# Altium PCB warship_demo_PCB.PcbDoc (part 3 of 3)
Units mm, origin at the board's own origin, x right, y up, seen from the top; angles counter-clockwise.
Board outline 160.38 x 121.38 mm, 2 copper layers (Top Layer, Bottom Layer); 272 components, 249 nets, 1200 pads, 295 vias.
Unrouted connection lines stored in the file: 2.
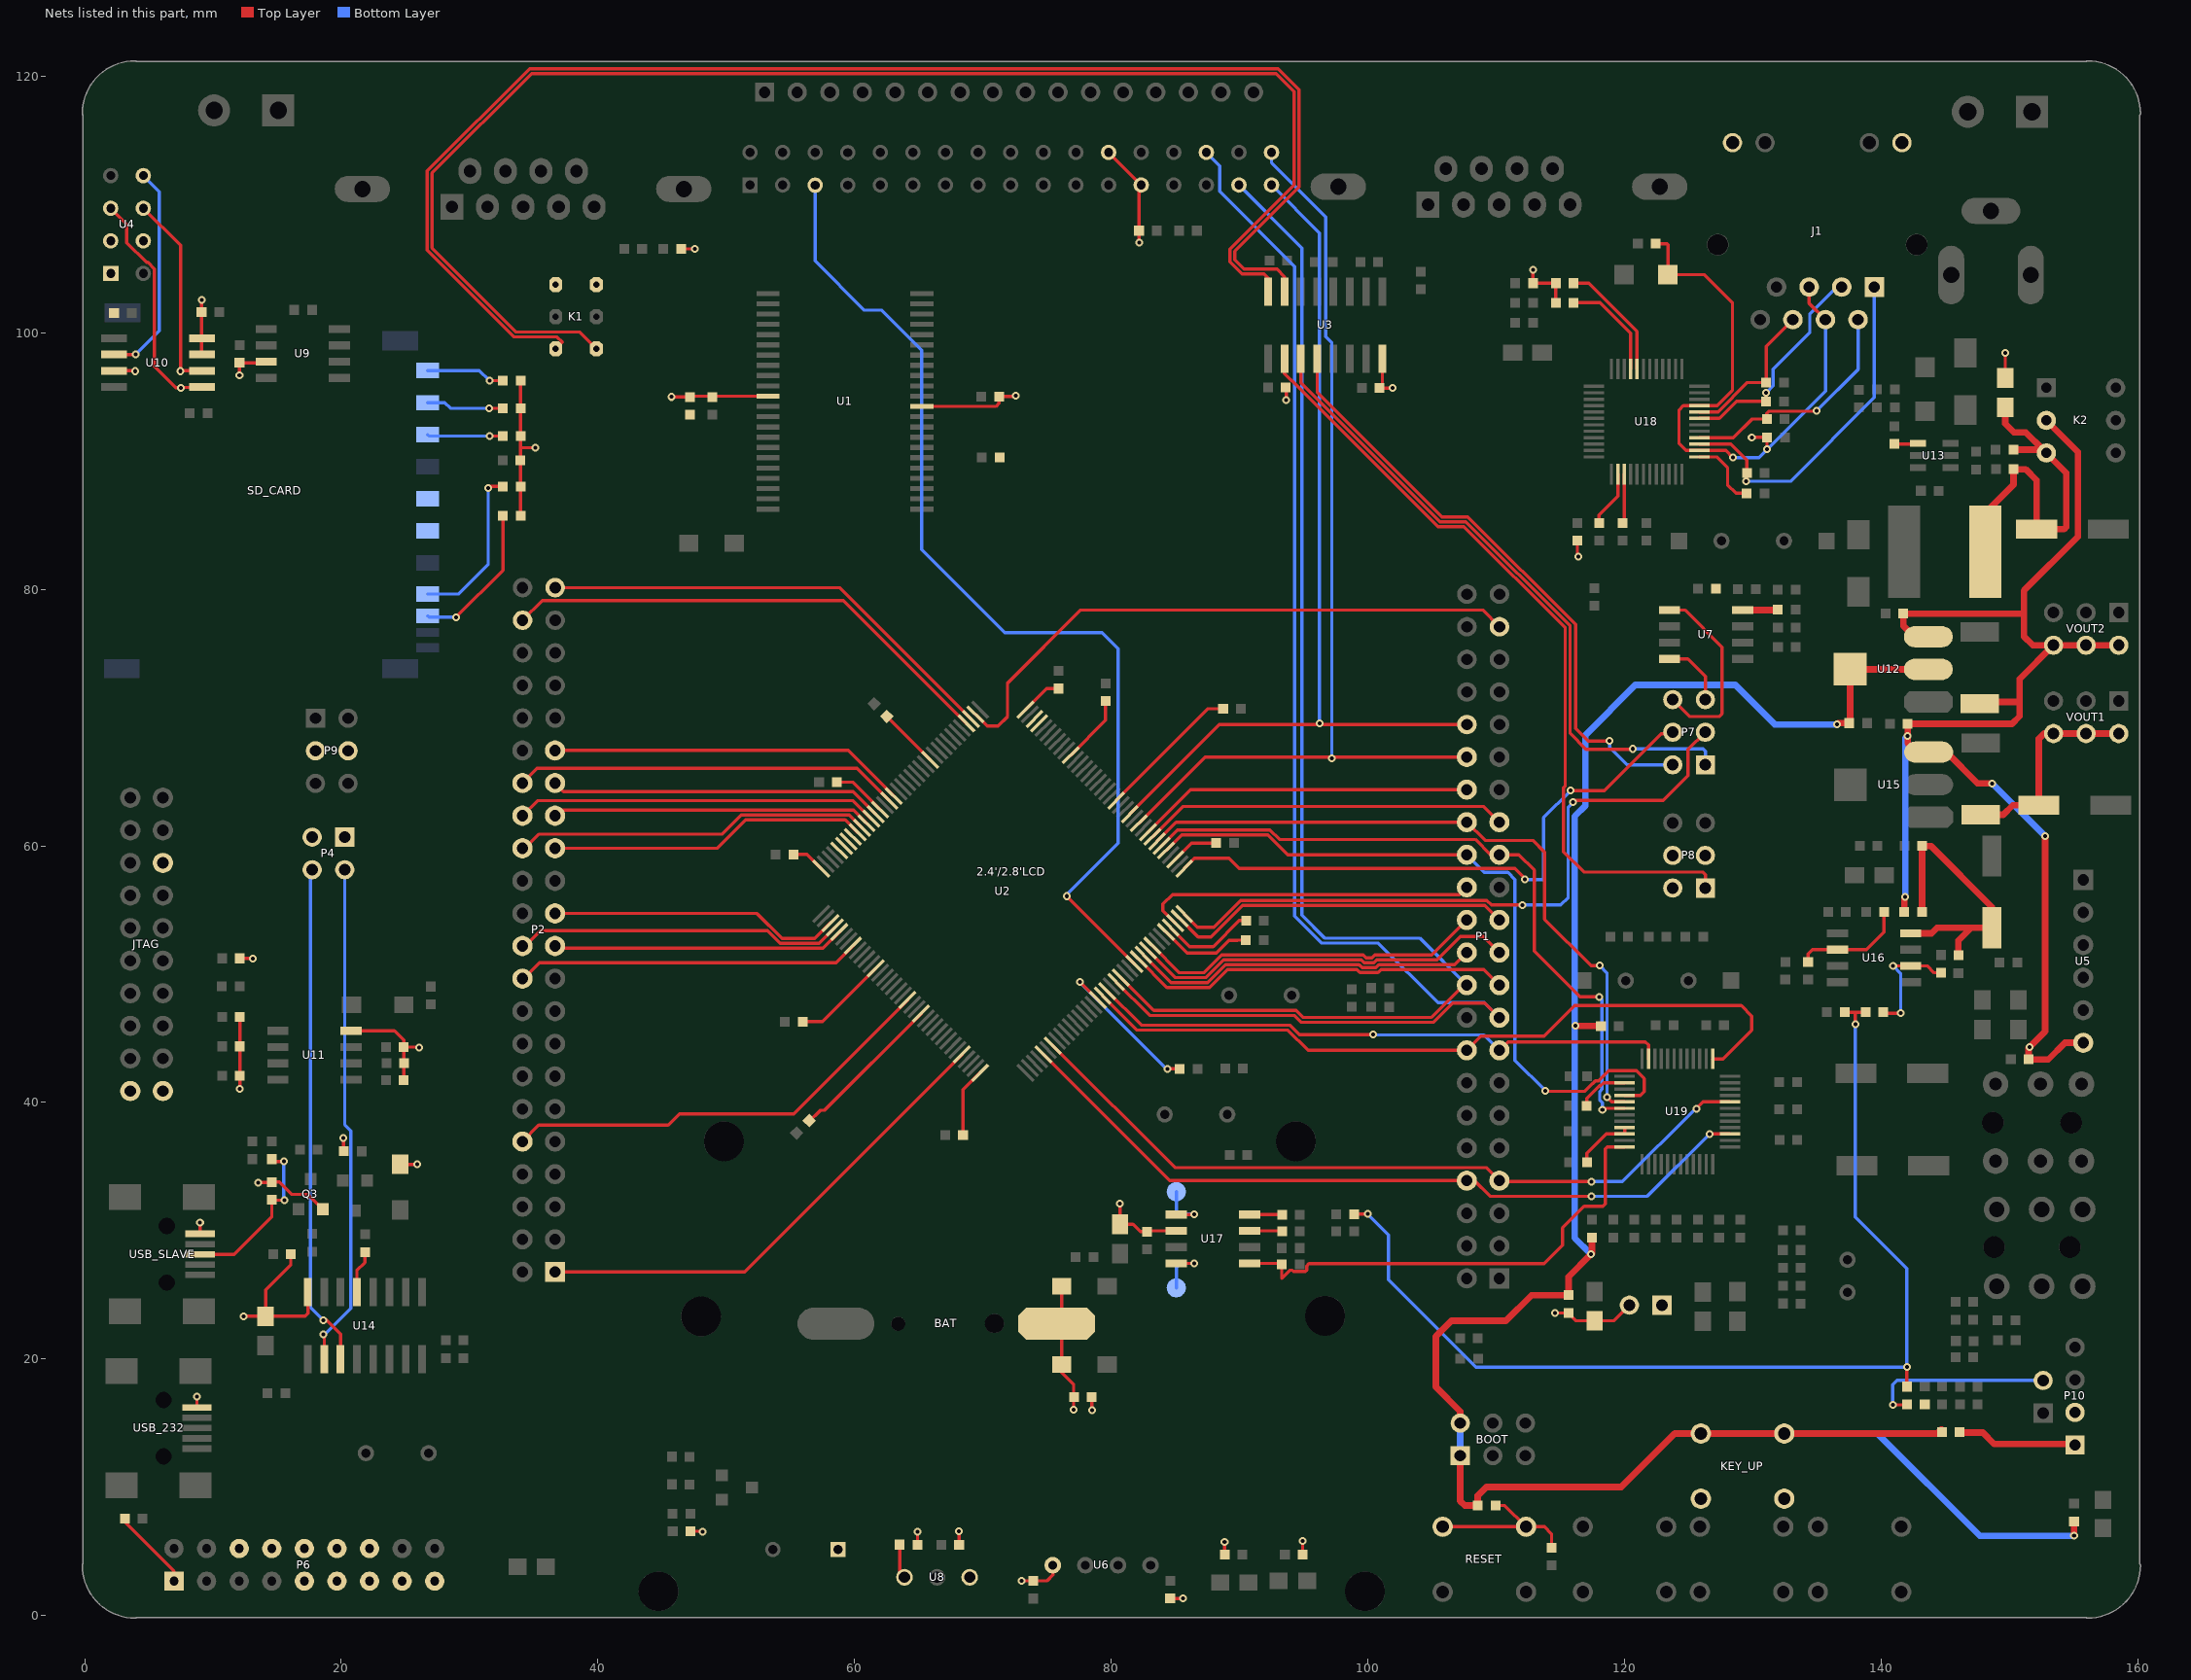
[diagram p3: the nets of this part, all layers, seen from the top]

## Via types
v1: diameter 0.61, hole 0.305, Top Layer to Bottom Layer, 291 vias
v2: diameter 3.58, hole 2.5, Top Layer to Bottom Layer, tented both sides, 4 vias

## Nets (pads, with @x,y where several pads share a name; then routed paths per layer and width w, separated by ;. In a path a pad name is that pad's centre, name@x,y a point inside that pad or via, vN(x,y) a via of type N, cw(c..) or ccw(c..) an arc to the next point about the centre after c; other vN are vias at no path point) (continued)
NetR33_1: R33.1 R35.1 USB_SLAVE.3 | length 13.5
  Top Layer w0.254: USB_SLAVE.3@8.993,28.169 11.659,28.169 14.58,31.09 R35.1@14.58,32.41 14.757,32.233 14.91,32.385 v1(15.57,32.385) ; R33.1@14.58,35.585 14.757,35.408 v1(15.519,35.408)
  Bottom Layer w0.254: v1(15.519,35.408) 15.519,32.309 15.57,32.36 v1(15.57,32.385)
NetR44_2: R44.2 U13.4 | length 1.9
  Top Layer w0.254: R44.2@141.019,91.326 142.801,91.326 U13.4@142.85,91.374
NetR47_2: R47.2 U14.13 | length 3.4
  Top Layer w0.254: U14.13@21.209,25.206 21.209,26.899 21.844,27.534 R47.2@21.844,28.346
NetR50_2: R50.2 R51.2 U16.2 | length 8.8
  Top Layer w0.254: R51.2@134.291,50.965 134.291,51.589 134.62,51.918 U16.2@136.591,51.918 138.836,51.918 140.208,53.289 R50.2@140.208,54.862
NetR53_2: R53.2 R56.1 U16.6 | length 9.3
  Top Layer w0.254: R56.1@140.157,47.039 140.159,47.041 140.235,46.965 v1(141.503,46.965) ; v1(140.919,50.648) U16.6@142.291,50.648 143.586,50.648 144.12,50.114 R53.2@144.653,50.114
  Bottom Layer w0.254: v1(140.919,50.648) 141.503,50.063 v1(141.503,46.965)
NetR58_1: R58.1 U17.3 | length 2.6
  Top Layer w0.254: U17.3@90.765,29.997 93.283,29.997 R58.1@93.307,29.974
NetR61_1: R61.1 U17.4 | length 2.6
  Top Layer w0.254: U17.4@90.765,31.267 93.283,31.267 R61.1@93.307,31.244
NetR63_2: R63.2 U18.1 | length 5.7
  Top Layer w0.254: U18.1@125.813,90.318 127.182,90.318 128.016,89.484 128.016,88.138 128.675,87.479 R63.2@129.502,87.479
NetR65_2: R65.2 U18.21 | length 8.2
  Top Layer w0.254: R65.2@116.014,102.335 118.086,102.335 120.463,99.958 U18.21@120.463,97.168
NetR66_2: R66.2 U18.20 | length 9.4
  Top Layer w0.254: R66.2@116.014,103.859 117.197,103.859 120.963,100.093 U18.20@120.963,97.168
NetR68_1: R68.1 U19.26 | length 4
  Top Layer w0.254: R68.1@117.043,39.751 117.043,40.31 118.032,41.299 118.119,41.299 118.366,41.546 U19.26@120,41.546
NetR70_2: R70.2 U19.33 U19.34 | length 4.8
  Top Layer w0.254: R70.2@117.056,35.328 117.056,36.03 118.572,37.546 U19.34@120,37.546 U19.33@120,38.046
NetR72_2: R72.2 U18.38 | length 4.4
  Top Layer w0.254: R72.2@118.01,85.179 118.01,85.803 119.463,87.256 U18.38@119.463,88.968
NetR74_2: R74.2 U18.39 | length 3.8
  Top Layer w0.254: R74.2@119.839,85.179 119.963,85.303 U18.39@119.963,88.968
NetSP+_1: SP+.1 U17.5 | length 4.5
  Top Layer w0.254: U17.5@85.065,31.267 86.436,31.267 v1(86.462,31.293)
  Bottom Layer w0.254: SP+.1@85.065,33.045 85.065,31.471 85.242,31.293 v1(86.462,31.293)
NetSP-_1: SP-.1 U17.8 | length 4.5
  Top Layer w0.254: U17.8@85.065,27.457 v1(86.462,27.457)
  Bottom Layer w0.254: SP-.1@85.065,25.552 85.065,27.127 85.395,27.457 v1(86.462,27.457)
NRF_CE: P2.32 U2.93 U4.3 | length 30.1
  Top Layer w0.254: P2.32@34.112,64.897 35.255,66.04 60.192,66.04 U2.93@62.697,63.535
NRF_CS: P2.33 U2.92 U4.4 | length 27.9
  Top Layer w0.254: P2.33@36.652,67.437 59.502,67.437 U2.92@63.051,63.888
OV_D0: P1.19 P6.8 U2.26 | length 30.3
  Top Layer w0.254: U2.26@82.143,51.161 84.332,48.971 87.655,48.971 89.052,50.368 99.142,50.368 99.371,50.14 100.781,50.14 101.01,50.368 109.017,50.368 P1.19@110.236,49.149
OV_D1: P1.22 P6.9 U2.27 | length 27.3
  Top Layer w0.254: U2.27@82.496,51.514 84.658,49.352 87.498,49.352 88.895,50.749 99.3,50.749 99.529,50.521 100.623,50.521 100.852,50.749 106.756,50.749 P1.22@107.696,51.689
OV_D2: P1.21 P6.10 U2.28 | length 30.3
  Top Layer w0.254: U2.28@82.85,51.868 84.984,49.733 87.34,49.733 88.737,51.13 99.458,51.13 99.687,50.902 100.465,50.902 100.694,51.13 105.385,51.13 107.188,52.934 108.991,52.934 P1.21@110.236,51.689
OV_D3: P1.24 P6.11 U2.29 | length 27.3
  Top Layer w0.254: U2.29@83.204,52.221 85.31,50.114 87.182,50.114 88.579,51.511 99.616,51.511 99.845,51.283 100.307,51.283 100.536,51.511 104.978,51.511 P1.24@107.696,54.229
OV_D4: P1.29 P6.12 U2.44 | length 28.5
  Top Layer w0.254: U2.44@83.204,60.706 85.565,63.068 109.017,63.068 P1.29@110.236,61.849
OV_D5: P1.32 P6.13 U2.45 | length 26.2
  Top Layer w0.254: U2.45@82.85,61.06 86.179,64.389 P1.32@107.696,64.389
OV_D6: P2.31 P6.14 U2.96 | length 26
  Top Layer w0.254: P2.31@36.652,64.897 37.313,64.237 59.874,64.237 U2.96@61.637,62.474
OV_D7: P2.30 P6.15 U2.97 | length 28.2
  Top Layer w0.254: P2.30@34.112,62.357 35.281,63.525 59.878,63.525 U2.97@61.283,62.121
OV_SDA: P2.10 P6.6 U2.128 | length 34.6
  Top Layer w0.254: P2.10@34.112,36.957 35.382,38.227 45.466,38.227 46.355,39.116 55.249,39.116 U2.128@64.112,47.979
OV_VSYNC: P2.27 P6.17 R54.1 U2.100 | length 24.9
  Top Layer w0.254: P2.27@36.652,59.817 49.301,59.817 51.511,62.027 59.256,62.027 U2.100@60.223,61.06
PA0: KEY_UP.2 P1.26 U2.34 | length 26.1
  Top Layer w0.254: U2.34@84.971,53.989 84.023,54.937 84.023,55.474 84.76,56.21 107.137,56.21 P1.26@107.696,56.769
PA1: P1.23 P10.2 U2.35 | length 27
  Top Layer w0.254: U2.35@85.325,54.343 86.759,52.908 87.757,52.908 90.221,55.372 109.093,55.372 P1.23@110.236,54.229
PA2: P7.3 U2.36 | length 52.9
  Top Layer w0.254: U2.36@85.678,54.696 86.704,53.67 87.98,53.67 90.063,55.753 109.251,55.753 109.606,55.397 v1(112.039,55.397) ; v1(115.976,63.398) 116.129,63.551 123.012,63.551 124.943,65.481 124.943,67.513 P7.3@126.289,68.859
  Bottom Layer w0.254: v1(112.039,55.397) 115.011,55.397 115.595,55.982 115.595,63.017 v1(115.976,63.398)
PA3: P7.4 U2.37 | length 46.9
  Top Layer w0.254: U2.37@85.678,58.232 86.476,59.03 89.179,59.03 89.967,58.242 111.455,58.242 112.217,57.48 v1(112.217,57.379) ; v1(115.799,64.313) 118.415,64.313 122.834,68.732 P7.4@124.003,68.732
  Bottom Layer w0.254: v1(112.217,57.379) 113.69,57.379 113.69,62.205 v1(115.799,64.313)
PA5: P1.28 U2.41 U19.28 | length 57.9
  Top Layer w0.254: U2.41@84.264,59.646 85.477,60.858 92.202,60.858 93.751,59.309 P1.28@107.696,59.309 ; v1(113.817,40.919) 113.868,40.869 116.865,40.869 117.499,41.502 117.536,41.502 117.714,41.68 117.961,41.68 118.75,42.469 120.904,42.469 121.514,41.859 121.514,40.843 121.216,40.546 U19.28@120,40.546
  Bottom Layer w0.254: P1.28@107.696,59.309 109.068,57.937 110.896,57.937 111.455,57.379 111.455,43.282 v1(113.817,40.919)
PA6: P1.27 U2.42 U19.30 | length 54.5
  Top Layer w0.254: U2.42@83.911,59.999 85.151,61.239 92.36,61.239 93.096,60.503 108.356,60.503 109.55,59.309 P1.27@110.236,59.309 111.76,59.309 112.954,58.115 112.954,51.807 116.527,48.235 v1(118.034,48.235) ; v1(118.262,39.446) 118.362,39.546 U19.30@120,39.546
  Bottom Layer w0.254: v1(118.034,48.235) 118.237,48.031 118.237,41.024 118.059,40.846 118.059,40.18 118.262,39.977 v1(118.262,39.446)
PA7: P1.30 U2.43 U19.29 | length 54.8
  Top Layer w0.254: U2.43@83.557,60.353 85.053,61.849 P1.30@107.696,61.849 109.118,60.427 112.852,60.427 113.767,59.512 113.767,54.28 117.373,50.673 v1(118.059,50.673) ; v1(118.618,40.411) 118.983,40.046 U19.29@120,40.046
  Bottom Layer w0.254: v1(118.059,50.673) 118.618,50.114 v1(118.618,40.411)
PA9: P4.3 U2.101
PA10: P4.1 U2.102
PA11: P9.3 U2.103
PA12: P9.4 U2.104
PB1: 2.4'/2.8'LCD.34 P1.34 U2.47 | length 76.9
  Top Layer w0.254: U2.47@82.143,61.767 87.305,66.929 P1.34@107.696,66.929
  Bottom Layer w0.254: 2.4'/2.8'LCD.34@92.481,114.046 92.481,113.233 96.698,109.017 96.698,99.692 97.18,99.21 v1(97.18,66.827)
PB9: P2.1 R31.2 U2.140 U8.1 | length 41.4
  Top Layer w0.254: P2.1@36.652,26.797 51.415,26.797 U2.140@68.354,43.736 ; R31.2@63.513,5.539 63.513,3.365 U8.1@63.881,2.997
PB10: P8.3 U2.69
PB11: P8.4 U2.70
PB13: P1.41 U2.74 U4.5 U10.6 | length 62.6
  Top Layer w0.254: U4.5@4.572,109.703 7.468,106.807 v1(7.468,97.003) 7.495,97.03 U10.6@9.144,97.03 ; U2.74@69.415,70.252 70.325,69.342 71.171,69.342 71.907,70.079 71.907,72.695 77.597,78.384 108.941,78.384 P1.41@110.247,77.078
PB14: P2.43 U2.75 U4.7 U10.2 | length 53.5
  Top Layer w0.254: U10.2@2.286,98.298 v1@3.912,98.298 ; P2.43@36.663,80.126 58.834,80.126 U2.75@69.061,69.899
  Bottom Layer w0.254: v1(3.962,98.298) 5.817,100.152 5.817,110.998 U4.7@4.572,112.243
PB15: P2.42 U2.76 U4.6 U10.5 | length 57.4
  Top Layer w0.254: U4.6@2.032,109.703 3.277,108.458 3.277,107.01 4.81,105.477 4.926,105.477 5.426,104.976 5.426,97.368 7.087,95.707 v1(7.493,95.707) ; v1@7.52,95.734 U10.5@9.169,95.734 ; P2.42@34.123,77.586 35.658,79.121 59.132,79.121 U2.76@68.708,69.545
PC8: P2.29 R28.1 SD_CARD.7 U2.98 | length 37.7
  Top Layer w0.254: v1(31.445,87.884) 31.572,88.011 R28.1@32.588,88.011 ; P2.29@36.652,62.357 37.084,62.789 59.908,62.789 U2.98@60.93,61.767
  Bottom Layer w0.254: SD_CARD.7@26.721,79.629 29.108,79.629 31.445,81.966 v1(31.445,87.884)
PC9: P2.28 R29.1 SD_CARD.8 U2.99 | length 39.6
  Top Layer w0.254: v1(28.931,77.826) 32.588,81.483 R29.1@32.588,85.725 ; P2.28@34.112,59.817 34.29,59.817 35.382,60.909 49.657,60.909 51.156,62.408 59.582,62.408 U2.99@60.576,61.414
  Bottom Layer w0.254: SD_CARD.8@26.73,77.925 26.83,77.826 v1(28.931,77.826)
PC10: P2.23 R18.1 SD_CARD.9 U2.111 | length 29
  Top Layer w0.254: v1(31.547,96.266) R18.1@32.588,96.266 ; P2.23@36.652,54.737 52.395,54.737 54.351,52.781 56.894,52.781 U2.111@58.101,53.989
  Bottom Layer w0.254: SD_CARD.9@26.721,97.054 30.759,97.053 v1(31.547,96.266)
PC11: P2.22 R21.1 SD_CARD.1 U2.112 | length 31.8
  Top Layer w0.254: v1(31.521,94.107) R21.1@32.588,94.107 ; P2.22@34.112,52.197 34.315,52.197 35.509,53.391 53.202,53.391 54.193,52.4 57.22,52.4 U2.112@58.455,53.635
  Bottom Layer w0.254: SD_CARD.1@26.73,94.537 28.069,94.537 28.499,94.107 v1(31.521,94.107)
PC12: P2.21 SD_CARD.5 U2.113 | length 22.8
  Top Layer w0.254: P2.21@36.652,52.197 36.83,52.019 57.546,52.019 U2.113@58.808,53.282
PC13: P1.7 U2.7 U19.8 | length 59.7
  Top Layer w0.254: U2.7@75.425,44.443 84.943,34.925 109.22,34.925 P1.7@110.236,33.909 110.312,33.833 v1(117.424,33.833) ; v1(125.578,39.522) 126.101,40.046 U19.8@128.2,40.046
  Bottom Layer w0.254: v1(117.424,33.833) 119.834,33.833 125.524,39.522 v1(125.578,39.522)
PD2: P2.20 R23.1 SD_CARD.2 U2.116 | length 32.7
  Top Layer w0.254: v1(31.547,91.948) R23.1@32.588,91.948 ; P2.20@34.112,49.657 34.188,49.657 35.433,50.902 58.549,50.902 U2.116@59.869,52.221
  Bottom Layer w0.254: SD_CARD.2@26.73,92.048 26.83,91.948 v1(31.547,91.948)
PE6: P1.8 U2.5 U19.3 | length 60.1
  Top Layer w0.254: U2.5@74.718,43.736 84.545,33.909 P1.8@107.696,33.909 108.28,33.909 109.499,32.69 v1(117.424,32.69) ; v1(126.619,37.541) 126.624,37.546 U19.3@128.2,37.546
  Bottom Layer w0.254: v1(117.424,32.69) 121.768,32.69 v1(126.619,37.541)
PF6: P1.16 U2.18 U19.13 | length 59.2
  Top Layer w0.254: U2.18@79.314,48.332 82.003,45.644 93.758,45.644 95.333,44.069 P1.16@107.696,44.069 108.788,45.161 113.716,45.161 116.103,47.549 129.083,47.549 129.896,46.736 129.896,45.644 127.648,43.396 U19.13@126.85,43.396
PF7: P1.15 U2.19 U19.23 | length 45.6
  Top Layer w0.254: U2.19@79.668,48.686 82.329,46.025 93.916,46.025 94.653,45.288 v1(100.406,45.288) ; P1.15@110.236,44.069 110.896,44.729 121.615,44.729 121.85,44.494 U19.23@121.85,43.396
  Bottom Layer w0.254: v1(100.406,45.288) 100.432,45.263 109.042,45.263 P1.15@110.236,44.069
PF9: 2.4'/2.8'LCD.30 P1.17 U2.21 | length 113.9
  Top Layer w0.254: U2.21@80.375,49.393 82.981,46.787 94.232,46.787 94.765,46.253 105.105,46.253 106.604,47.752 109.093,47.752 P1.17@110.236,46.609
  Bottom Layer w0.254: 2.4'/2.8'LCD.30@87.401,114.046 88.443,113.005 88.443,111.003 94.29,105.156 94.29,54.528 96.393,52.426 100.813,52.426 105.461,47.777 109.068,47.777 P1.17@110.236,46.609
PF10: 2.4'/2.8'LCD.31 P1.20 U2.22 | length 103.3
  Top Layer w0.254: U2.22@80.729,49.746 83.307,47.168 94.39,47.168 94.923,46.634 104.947,46.634 107.462,49.149 P1.20@107.696,49.149
  Bottom Layer w0.254: 2.4'/2.8'LCD.31@89.941,111.506 94.844,106.604 94.844,54.61 96.647,52.807 104.038,52.807 P1.20@107.696,49.149
PF11: 2.4'/2.8'LCD.33 P1.36 U2.49 | length 72.7
  Top Layer w0.254: U2.49@81.436,62.474 88.42,69.458 P1.36@107.707,69.458
  Bottom Layer w0.254: 2.4'/2.8'LCD.33@92.481,111.506 96.215,107.772 v1(96.215,69.545)
PWM_AUDIO: C62.2 P11.2 | length 14.5
  Top Layer w0.254: v1(140.894,16.434) 141.948,16.434 C62.2@141.986,16.472
  Bottom Layer w0.254: v1(140.894,16.434) 140.894,18.009 141.224,18.339 P11.2@152.603,18.339
RESET: 2.4'/2.8'LCD.5 C12.1 D8.1 JTAG.15 R3.1 RESET.1 U2.25 | length 93.7
  Top Layer w0.254: D8.1@24.587,35.179 v1(25.908,35.179) ; v1(76.513,56.083) U2.25@81.789,50.807 ; RESET.1@105.816,6.934 RESET.1@112.316,6.934 ; R3.1@109.931,8.585 110.665,8.585 RESET.1@112.316,6.934 ; C12.1@114.3,5.309 114.3,6.375 113.741,6.934 RESET.1@112.316,6.934
  Bottom Layer w0.254: 2.4'/2.8'LCD.5@56.923,111.5 56.923,105.586 60.757,101.752 62.103,101.752 65.227,98.628 65.227,83.083 71.704,76.606 79.273,76.606 80.518,75.362 80.518,60.198 76.513,56.193 v1(76.513,56.083)
RS485_RX: P7.5 U7.4 | length 5.2
  Top Layer w0.254: U7.4@123.495,74.574 124.917,74.574 126.289,73.203 P7.5@126.289,71.399
RS485_TX: P7.6 U7.1 | length 14.9
  Top Layer w0.254: U7.1@123.495,78.384 124.689,78.384 127.584,75.489 127.584,70.307 127.356,70.079 125.07,70.079 P7.6@123.749,71.399
RXD: P4.4 U14.3 | length 39.3
  Top Layer w0.254: v1(18.593,23.038) 18.847,23.038 19.939,21.946 U14.3@19.939,20.006
  Bottom Layer w0.254: P4.4@17.729,58.141 17.59,58.001 17.59,24.041 v1(18.593,23.038)
SPK_CTRL: R52.1 U17.1 U19.36 | length 38.2
  Top Layer w0.254: U17.1@90.765,27.457 93.207,27.457 R52.1@93.281,27.383 93.281,26.302 93.906,26.927 94.107,26.927 94.211,26.822 95.12,26.822 95.225,26.927 95.225,27.263 95.394,27.432 113.716,27.432 115.164,28.88 115.164,30.226 116.84,31.902 118.288,31.902 118.491,32.106 118.491,36.398 118.639,36.546 U19.36@120,36.546
SPK_IN: C60.1 C62.1 C73.1 R56.2 | length 82.6
  Top Layer w0.254: C73.1@98.908,31.293 99.949,31.293 v1(99.974,31.318) ; C60.1@137.141,47.039 137.143,47.041 137.973,47.041 ; v1(137.973,46.101) 137.973,47.041 ; R56.2@138.773,47.041 137.973,47.041 ; v1(141.986,19.38) 141.986,17.858 C62.1@141.988,17.856
  Bottom Layer w0.254: v1(99.974,31.318) 101.6,29.693 101.6,26.187 108.407,19.38 v1(141.986,19.38) 141.986,27.076 137.973,31.09 v1(137.973,46.101)
TPAD: P10.1 R41.1 | length 9.4
  Top Layer w0.508: R41.1@146.202,14.402 146.329,14.275 147.904,14.275 148.8,13.379 155.092,13.379 P10.1@155.092,13.31
TPRX+: J1.1 R80.2 U18.3 | length 27.2
  Top Layer w0.254: U18.3@125.813,91.318 128.265,91.318 129.527,90.056 R80.2@129.527,89.079 129.527,88.481 v1(129.464,88.417)
  Bottom Layer w0.254: v1(129.464,88.417) 132.918,88.417 139.451,94.95 J1.1@139.451,103.558
TPRX-: J1.2 R81.2 U18.4 | length 18.7
  Top Layer w0.254: U18.4@125.813,91.818 128.47,91.818 129.923,93.27 R81.2@131.077,93.27 131.077,93.713 131.242,93.878 134.925,93.878 v1(134.95,93.904)
  Bottom Layer w0.254: v1(134.95,93.904) 138.181,97.135 J1.2@138.181,101.018
TPTX+: J1.3 R82.2 U18.7 | length 17.4
  Top Layer w0.254: U18.7@125.813,93.318 127.379,93.318 128.703,94.642 R82.2@131.026,94.642 131.026,95.288 v1(131.013,95.301)
  Bottom Layer w0.254: v1(131.013,95.301) 131.572,95.86 131.572,97.155 134.417,100 134.417,101.448 136.527,103.558 J1.3@136.911,103.558
TPTX-: J1.6 R83.2 U18.8 | length 11.9
  Top Layer w0.254: U18.8@125.813,93.818 127.27,93.818 129.567,96.115 R83.2@131.026,96.115 131.026,98.943 J1.6@133.101,101.018
TXD: P4.2 U14.2 | length 39.3
  Top Layer w0.254: v1(18.593,21.92) 18.669,21.844 U14.2@18.669,20.006
  Bottom Layer w0.254: v1(18.593,21.92) 18.697,21.92 20.726,23.949 20.726,37.795 20.269,38.252 P4.2@20.269,58.141
U2_RX: P7.1 U3.11 | length 51.3
  Top Layer w0.254: U3.11@94.767,97.984 94.767,96.102 105.602,85.268 107.625,85.268 115.748,77.145 115.748,68.783 116.992,67.539 v1@120.625,67.539
  Bottom Layer w0.254: v1(120.625,67.564) 126.111,67.564 126.289,67.386 P7.1@126.289,66.319
U2_TX: P7.2 U3.12 | length 47.4
  Top Layer w0.254: U3.12@96.037,97.984 96.037,95.371 105.76,85.649 107.783,85.649 116.18,77.252 116.18,69.164 117.17,68.174 v1(118.821,68.174)
  Bottom Layer w0.254: v1(118.821,68.174) 118.821,67.691 120.193,66.319 P7.2@123.749,66.319
U3_232RX: K1.6 U3.8 | length 112.8
  Top Layer w0.254: K1.6@39.878,98.744 38.572,100.051 33.63,100.051 27.076,106.604 27.076,112.446 34.823,120.193 92.837,120.193 94.234,118.796 94.234,111.506 89.23,106.502 89.23,105.512 90.17,104.572 91.897,104.572 92.227,104.242 U3.8@92.227,103.184
U3_232TX: K1.5 U3.7 | length 113.2
  Top Layer w0.254: K1.5@36.703,98.744 37.218,99.259 36.807,99.67 33.472,99.67 26.695,106.446 26.695,112.604 34.666,120.574 92.995,120.574 94.615,118.954 94.615,111.348 89.611,106.344 89.611,105.669 90.328,104.953 92.913,104.953 93.497,104.369 U3.7@93.497,103.184
U3_RX: K1.2 P8.1 U3.10 | length 61.6
  Top Layer w0.254: U3.10@93.497,97.984 93.497,96.799 94.007,96.29 94.041,96.29 105.444,84.887 107.467,84.887 115.367,76.987 115.367,64.671 115.24,64.544 115.24,59.538 116.815,57.963 126.086,57.963 126.289,57.76 P8.1@126.289,56.718
U3_TX: K1.1 P8.2 R17.2 | length 1
  Top Layer w0.254: R17.2@93.586,95.731 93.624,95.693 v1(93.624,94.742)
VBTN: C46.2 C47.1 F1.2 K2.3 L1.1 R45.1 | length 30
  Top Layer w0.254: L1.1@148.107,82.931 148.184,83.007 L1.1@148.184,86.03 ; C47.1@151.714,84.658 151.74,84.684 C47.1@151.917,84.684
  Top Layer w0.508: L1.1@148.184,86.03 150.304,88.151 C46.2@150.304,89.356 151.233,89.356 152.095,88.494 C47.1@152.095,84.684 154.229,84.684 154.407,84.861 154.407,89.078 K2.3@152.857,90.627 K2.3@152.603,90.881 ; F1.2@149.657,94.183 149.657,92.913 150.343,92.227 151.257,92.227 K2.3@152.603,90.881 ; R45.1@150.292,90.881 K2.3@152.603,90.881
VCC2.5: C81.2 C82.2 C100.1 J1.4 J1.5 U18.2 U18.9 | length 48.3
  Top Layer w0.254: C81.2@122.415,106.932 123.293,106.932 123.368,106.858 C82.2@123.368,104.521 126.213,104.521 128.397,102.337 128.397,95.504 127.211,94.318 U18.9@125.813,94.318 124.569,94.318 124.231,93.98 124.231,91.364 124.777,90.818 U18.2@125.813,90.818 127.876,90.818 v1(128.422,90.272) ; v1(129.896,91.821) 129.921,91.846 C100.1@131.089,91.846 v1(131.089,90.907) ; J1.5@134.371,103.558 134.371,102.288 J1.4@135.641,101.018
  Bottom Layer w0.254: v1(128.422,90.272) 130.454,90.272 v1(131.089,90.907) 135.641,95.458 J1.4@135.641,101.018
VCC3.3: 2.4'/2.8'LCD.24 2.4'/2.8'LCD.25 BAT.1 BEEP.1 BOOT.1 BOOT.2 C3.2 C25.2 C26.1 C31.1 C34.2 C35.1 C36.1 C38.2 C39.2 C40.1 C43.2 C44.1 D1.1 D2.1 D7.1 J1.9 J1.12 JTAG.1 JTAG.2 KEY_UP.1 L2.1 P6.1 Q3.1 R3.2 R4.2 R5.1 R6.1 R7.1 R8.1 R9.1 R10.1 R18.2 R20.2 R21.2 R22.1 R23.2 R24.2 R26.2 R27.1 R28.2 R29.2 R31.1 R34.2 R35.2 R39.1 R40.1 R41.2 R42.1 R46.1 R64.2 R65.1 R66.1 R67.2 SD_CARD.4 U3.16 U4.2 U6.1 U7.8 U8.3 U10.3 U10.7 U10.8 U11.8 U12.2 U12.4 VOUT1.2 VOUT1.4 VOUT1.6 | length 277.5
  Top Layer w0.254: U10.3@2.286,97.028 3.912,97.028 v1(3.937,97.003) ; C26.1@3.124,7.569 3.124,7.315 6.96,3.48 P6.1@6.96,2.692 ; v1(9.119,102.54) 9.106,102.527 C38.2@9.106,101.602 9.106,98.338 U10.7@9.144,98.3 ; v1(12.09,41.072) R5.1@12.09,42.088 R6.1@12.09,44.374 R7.1@12.09,46.66 ; R10.1@12.09,51.232 v1(13.106,51.232) ; v1(13.538,33.757) 14.543,33.757 R35.2@14.581,33.795 15.176,33.795 16.129,32.842 17.377,32.842 Q3.1@18.552,31.667 ; v1(20.168,37.236) 20.168,36.22 R46.1@20.193,36.195 ; U11.8@20.752,45.591 24.132,45.591 24.867,44.856 C40.1@24.867,44.323 ; R40.1@24.867,41.758 C40.1@24.867,44.323 ; v1(26.06,44.298) 26.035,44.323 C40.1@24.867,44.323 ; R29.2@33.972,85.723 R28.2@33.972,88.009 33.972,91.034 ; R18.2@33.972,96.264 R21.2@33.972,94.105 R23.2@33.972,91.946 33.972,91.034 ; v1(35.128,91.034) 33.972,91.034 ; R34.2@47.206,6.577 48.135,6.577 v1(48.158,6.553) ; R31.1@64.897,5.537 v1(64.897,6.553) ; v1(68.123,6.579) 68.135,6.566 C39.2@68.135,5.536 ; v1(73,2.718) C35.1@73.914,2.718 74.981,2.718 75.438,3.175 U6.1@75.438,3.937 ; D2.1@76.124,25.679 D1.1@76.124,19.583 76.124,18.948 77.064,18.009 v1(77.064,16.053) ; 2.4'/2.8'LCD.24@79.781,114.046 2.4'/2.8'LCD.25@82.321,111.506 82.156,111.341 C3.2@82.156,107.952 82.156,107.048 v1(82.169,107.036) ; R27.1@84.582,1.346 v1(85.598,1.346) ; v1(88.824,5.766) 88.837,5.753 R20.2@88.837,4.751 ; v1(94.894,5.817) 94.907,5.804 R24.2@94.907,4.774 ; U3.16@101.117,97.984 101.117,95.896 C25.2@100.901,95.68 101.929,95.68 v1(101.93,95.682) ; v1(112.852,104.902) L2.1@112.852,103.861 R66.1@114.63,103.861 R65.1@114.63,102.337 ; R64.2@116.307,83.782 116.307,82.626 v1(116.383,82.55) ; C34.2@131.901,78.384 C34.2@131.928,78.411
  Top Layer w0.508: BOOT.1@107.188,12.471 107.188,8.941 107.542,8.587 R3.2@108.547,8.587 108.547,9.36 109.22,10.033 119.736,10.033 123.901,14.199 KEY_UP.1@125.936,14.199 KEY_UP.1@132.436,14.199 144.359,14.199 R41.2@144.691,14.53 ; BOOT.2@107.188,15.011 107.188,15.926 105.283,17.831 105.283,21.768 106.502,22.987 110.744,22.987 112.738,24.981 R4.2@115.622,24.981 115.622,26.418 v1(117.373,28.169) 117.448,28.243 R42.1@117.448,29.477 ; v1(116.154,45.974) 118.124,45.974 R67.2@118.148,45.95 ; U7.8@129.195,78.384 C34.2@131.901,78.384 ; v1(136.55,69.469) 136.654,69.572 C43.2@137.503,69.572 137.566,69.636 U12.4@137.566,73.762 U12.2@143.662,73.762 ; D7.1@147.752,62.433 149.504,62.433 150.241,63.17 C44.1@152.273,63.17 152.273,68.351 152.679,68.758 VOUT1.6@153.416,68.758 VOUT1.4@155.956,68.758 VOUT1.2@158.496,68.758 ; v1(155.015,6.225) R26.2@155.015,7.353
  Bottom Layer w0.508: BOOT.1@107.188,12.471 BOOT.2@107.188,15.011 ; v1(117.373,28.169) 116.103,29.439 116.103,62.306 116.942,63.144 116.942,68.656 120.828,72.542 128.626,72.542 131.699,69.469 v1(136.55,69.469) ; KEY_UP.1@132.436,14.199 139.7,14.199 147.674,6.225 v1(155.015,6.225)
VCC3.3M: C1.2 C2.1 C13.2 C14.2 C15.2 C16.2 C17.2 C18.2 C19.2 C20.2 C21.2 C22.2 C23.2 R1.2 R8.2 R9.2 U1.11 U1.33 U2.17 U2.39 U2.52 U2.62 U2.72 U2.84 U2.95 U2.108 U2.121 U2.131 U2.144 | length 89.2
  Top Layer w0.254: v1(45.72,94.996) 45.707,94.983 R9.2@47.169,94.983 47.238,95.052 U1.33@53.242,95.052 ; C16.2@55.232,59.333 56.293,59.333 U2.108@57.394,58.232 ; C15.2@55.944,46.303 57.486,46.303 U2.121@61.637,50.453 ; C14.2@56.439,38.506 57.326,39.394 57.648,39.394 U2.131@65.172,46.918 ; C17.2@58.61,64.972 59.847,64.972 U2.95@61.99,62.828 ; C18.2@62.763,69.85 62.961,69.652 62.944,69.652 U2.84@65.879,66.717 ; U1.11@65.242,94.252 71,94.252 71.247,94.499 C2.1@71.247,95.021 72.492,95.021 v1(72.542,95.072) ; C13.2@68.44,37.463 68.44,40.994 U2.144@69.768,42.322 ; U2.72@73.304,70.606 74.961,72.263 C19.2@75.895,72.263 ; U2.62@76.84,67.07 79.551,69.782 C20.2@79.551,71.285 ; v1(77.536,49.403) U2.17@78.961,47.979 ; R8.2@78.473,17.042 78.473,16.066 v1(78.511,16.027) ; U2.52@80.375,63.535 87.53,70.69 C21.2@88.709,70.69 ; v1(84.379,42.623) C23.2@85.331,42.623 ; U2.39@84.971,58.939 86.258,60.225 C22.2@88.176,60.225
  Bottom Layer w0.254: v1(77.536,49.403) 77.536,49.365 84.278,42.623 v1(84.379,42.623)
VCC5: C32.2 C37.2 C45.2 C50.1 C51.2 C54.2 C65.1 C66.2 D6.1 K2.2 R15.1 R59.1 U5.6 U9.3 U12.3 U14.16 U15.3 U17.6 VOUT2.2 VOUT2.4 VOUT2.6 | length 133.3
  Top Layer w0.254: v1(12.063,96.674) C37.2@12.063,97.65 14.05,97.65 U9.3@14.14,97.741 ; v1(12.395,23.343) C51.2@14.099,23.343 ; C50.1@16.066,28.192 16.066,27.368 14.099,25.402 C51.2@14.099,23.343 ; U14.16@17.399,25.206 17.399,23.571 17.17,23.343 C51.2@14.099,23.343 ; R15.1@46.482,106.528 v1(47.549,106.528) ; v1(80.67,32.106) C65.1@80.67,30.505 81.686,30.505 82.258,29.934 C66.2@82.78,29.934 82.844,29.997 U17.6@85.065,29.997
  Top Layer w0.508: R59.1@141.783,54.864 141.783,55.956 v1(141.859,56.032) ; U12.3@143.662,76.302 142.57,76.302 141.707,77.165 C54.2@141.707,78.105 151.105,78.105 ; D6.1@147.65,71.095 147.777,71.222 150.774,71.222 ; v1(148.641,64.872) 147.498,64.872 145.059,67.31 U15.3@143.688,67.31 143.292,67.705 142.353,67.705 142.049,68.008 v1(142.049,68.58) C45.2@142.049,69.518 150.189,69.518 150.774,70.104 150.774,71.222 ; v1(152.756,60.757) 152.756,45.542 v1(151.536,44.323) 151.473,44.259 C32.2@151.473,43.356 153.008,43.356 154.305,44.653 U5.6@155.727,44.653 ; K2.2@152.857,93.167 155.321,90.703 155.321,84.099 151.105,79.883 151.105,76.327 151.79,75.641 VOUT2.6@153.416,75.641 ; VOUT2.2@158.496,75.641 VOUT2.4@155.956,75.641 VOUT2.6@153.416,75.641 ; 150.774,71.222 150.774,73 VOUT2.6@153.416,75.641
  Bottom Layer w0.508: v1(141.859,56.032) 141.859,68.389 v1(142.049,68.58) ; v1(148.641,64.872) v1(152.756,60.757)
VDDA: C10.2 C11.1 P5.2 R4.1 U2.33 | length 13.9
  Top Layer w0.254: U2.33@84.618,53.635 86.107,52.146 87.935,52.146 89.967,54.178 C11.1@90.5,54.178 ; v1(114.579,23.597) R4.1@115.621,23.597 116.23,22.987 C10.2@117.653,22.987 119.151,22.987 P5.2@120.371,24.206
VDDAMP: C70.1 C71.1 R57.1 R59.2 U16.8 | length 23.2
  Top Layer w0.508: U16.8@142.291,53.188 143.916,53.188 144.348,53.619 146.99,53.619 ; R59.2@143.167,54.862 143.167,59.982 C71.1@143.18,59.995 143.866,59.995 148.615,55.245 C70.1@148.615,53.619 146.99,53.619 ; R57.1@146.001,51.473 146.001,52.63 146.99,53.619
VREF+: C24.2 P5.1 U2.32 | length 7.3
  Top Layer w0.254: U2.32@84.264,53.282 85.908,51.638 88.167,51.638 89.158,52.629 89.814,52.629 89.841,52.656 C24.2@90.487,52.656
VUSB: F1.1 USB_232.1 USB_SLAVE.1 | length 3.7
  Top Layer w0.254: v1(8.738,17.094) 8.747,17.085 USB_232.1@8.747,16.22 ; USB_SLAVE.1@8.993,29.769 v1(8.993,30.631) ; F1.1@149.657,96.469 v1(149.657,98.425)
pads on no net: 2.4'/2.8'LCD. 2.4'/2.8'LCD.32 BAT.0 COM2.0 COM2.1 COM2.4 COM2.6 COM2.7 COM2.8 COM2.9 COM3.0 COM3.5 J1.7 JTAG.11 JTAG.17 JTAG.19 K2.1 K2.4 K2.5 K2.6 LINE_IN.0 PHONE.0 SD_CARD.10 SD_CARD.11 SD_CARD.12 U2.106 U7.3 U9.5 U14.9 U14.10 U14.11 U14.12 U14.15 U18.19 U18.46 U19.9 U19.10 U19.11 U19.12 U19.15 U19.25 U19.27 U19.43 U19.45 USB_232.4 USB_232.6 USB_232.7 USB_232.8 USB_232.9 USB_232.MH1 USB_232.MH2 USB_SLAVE.4 USB_SLAVE.6 USB_SLAVE.7 USB_SLAVE.8 USB_SLAVE.9 USB_SLAVE.MH1 USB_SLAVE.MH2 Y4. Y5.
copper on no net:
  other v2: 156.39,3.58 3.58,3.61 156.42,117.39 3.61,117.42

## Keep-outs
Keep-Out Layer:
  lines w0.254: -0.063,3.937 ccw(c3.937,3.937) 3.937,-0.063 ; -0.063,117.063 cw(c3.937,117.063) 3.937,121.063 ; 0,3.874 0,117.348 ; 3.652,121 156.126,121 ; 3.874,0 156.126,0 ; 156.063,-0.063 ccw(c156.063,3.937) 160.063,3.937 ; 156.063,121.063 cw(c156.063,117.063) 160.063,117.063 ; 160,3.874 160,117.126

## Silkscreen, mask and mechanical layers (free items; w line width, h text height)
Top Overlay:
  circle w0.254: c3.61,117.42 r3.486
  lines w0.127: 10.287,66.091 28.194,66.091 ; 10.363,68.682 28.219,68.682 ; 10.566,59.36 28.27,59.36 ; 16.358,56.972 16.205,56.82 10.566,56.82 10.566,61.951 16.459,61.951 ; 16.662,63.652 10.338,63.652 10.338,64.16 10.338,71.222 16.713,71.222 ; 20.98,57.125 27.838,57.125 27.838,62.154 27.788,62.205 20.98,62.205 ; 21.793,63.602 28.219,63.602 28.219,71.196 21.819,71.196 ; 28.915,27.727 28.88,27.762 28.956,27.686 ; 29.185,35.651 40.97,35.651 ; 29.185,40.782 40.97,40.782 ; 29.185,43.245 40.97,43.245 ; 29.185,45.862 40.97,45.862 ; 29.21,58.536 41.021,58.536 ; 29.21,60.949 40.996,60.949 ; 29.21,66.067 41.097,66.067 ; 29.21,78.818 40.869,78.818 ; 29.235,25.603 29.235,81.142 29.54,81.447 ; 29.235,28.056 41.046,28.056 ; 29.235,30.596 40.919,30.596 ; 29.235,33.136 41.021,33.136 ; 29.235,38.242 41.021,38.242 ; 29.235,50.942 40.97,50.942 ; 29.235,56.098 40.919,56.098 ; 29.235,63.54 40.996,63.54 ; 29.235,71.211 41.021,71.211 ; 29.235,73.7 41.021,73.7 ; 29.235,76.291 41.021,76.291 ; 29.271,25.568 32.663,25.568 ; 29.312,68.696 41.097,68.696 ; 29.337,48.351 41.021,48.351 ; 29.337,53.469 41.021,53.469 ; 29.439,81.371 37.948,81.371 40.909,81.371 40.996,81.284 ; 31.471,3.785 32.893,3.785 32.563,4.115 ; 32.563,3.404 32.868,3.708 ; 34.366,5.105 34.671,4.801 34.671,4.775 34.747,4.775 ; 34.417,2.438 34.747,2.769 34.747,0.33 ; 34.747,7.214 34.747,4.775 ; 34.823,2.743 35.128,2.438 ; 35.077,5.105 34.747,4.775 ; 36.906,3.861 37.211,4.166 ; 37.211,3.454 36.881,3.785 38.303,3.785 ; 37.922,25.527 41.021,25.527 41.021,81.382 40.996,81.407 ; 103.022,27.483 114.429,27.483 ; 103.048,30.099 114.3,30.099 ; 103.048,32.537 114.454,32.537 ; 103.048,37.694 114.454,37.694 ; 103.048,60.503 114.454,60.503 ; 103.073,35.154 114.325,35.154 ; 103.073,40.107 114.479,40.107 ; 103.073,63.119 114.325,63.119 ; 103.073,65.557 114.479,65.557 ; 103.073,70.714 114.479,70.714 ; 103.099,42.723 114.351,42.723 ; 103.099,45.161 114.505,45.161 ; 103.099,50.317 114.505,50.317 ; 103.099,68.174 114.351,68.174 ; 103.099,73.33 114.351,73.33 ; 103.099,75.768 114.505,75.768 ; 103.124,47.777 114.376,47.777 ; 103.124,52.934 114.376,52.934 ; 103.124,55.372 114.53,55.372 ; 103.124,78.384 114.376,78.384 ; 103.149,57.988 114.402,57.988 ; 106.247,80.888 103.16,80.888 103.16,25.008 106.277,25.008 106.402,25.133 114.427,25.133 114.427,80.72 111.675,80.72 111.506,80.888 ; 116.51,60.655 119.024,60.655 130.277,60.655 133.325,60.655 ; 116.51,70.256 119.024,70.256 130.277,70.256 133.325,70.256 ; 116.611,58.039 118.999,58.039 130.405,58.039 133.35,58.039 ; 116.611,67.64 118.999,67.64 130.405,67.64 133.35,67.64 ; 122.479,63.068 116.586,63.068 116.586,55.575 116.586,55.347 133.375,55.347 133.375,63.094 127.584,63.094 ; 122.479,72.669 116.586,72.669 116.586,65.176 116.586,64.948 133.375,64.948 133.375,72.695 127.584,72.695 ; 148.742,17.094 153.822,17.094 159.791,17.094 159.842,17.043 ; 151.333,14.529 148.717,14.529 148.717,19.609 151.333,19.609 ; 153.822,14.554 159.741,14.554 159.842,14.656 ; 153.822,19.685 159.842,19.685 ; 154.457,43.394 152.948,43.394 152.654,43.688 152.654,58.471 152.806,58.623 154.457,58.623 ; 154.457,45.822 159.766,45.822 ; 154.457,48.514 159.766,48.514 ; 154.457,51.054 159.766,51.054 ; 154.457,53.518 159.766,53.518 ; 154.457,56.064 159.766,56.064 ; 156.362,12.04 159.842,12.04 159.842,22.098 159.741,22.2 156.362,22.2 ; 157.017,58.572 159.817,58.572 159.817,43.358 157.053,43.358 ; 159.69,26.137 159.69,31.242
  lines w0.254: 38.266,4.235 ccw(c34.799,3.758) 38.281,4.107
  text "PD14" at 52.172,120.244 h0.5
  text "PD15" at 54.737,120.244 h0.5
  text "PD0" at 57.556,120.244 h0.5
  text "PD1" at 60.071,120.244 h0.5
  text "PE7" at 62.586,120.244 h0.5
  text "PE8" at 65.176,120.244 h0.5
  text "PE9" at 67.488,120.244 h0.5
  text "PE10" at 70.028,120.244 h0.5
  text "PE11" at 72.644,120.244 h0.5
  text "PE12" at 75.082,120.244 h0.5
  text "PE13" at 77.597,120.244 h0.5
  text "PE14" at 80.112,120.244 h0.5
  text "PE15" at 82.728,120.244 h0.5
  text "PD8" at 85.471,120.244 h0.5
  text "PD9" at 87.935,120.244 h0.5
  text "PD10" at 90.348,120.244 h0.5
  text "CANH" at 13.945,111.938 h0.6
  text "CANL" at 8.89,111.887 h0.6
  text "WIRELESS" at 6.477,111.608 h1 r270
  text "B" at 146.329,111.328 h1
  text "A" at 151.587,111.328 h1
  text "CAN" at 10.973,110.363 h1
  text "EARTHNET" at 130.277,97.638 h1
  text "PB14" at 38.263,79.771 h0.8
  text "GND" at 29.774,79.694 h0.8
  text "PB12" at 103.471,79.223 h0.8
  text "GND" at 111.735,79.172 h0.8
  text "SPI2" at 43.764,78.156 h1.5
  text "GND" at 149.606,77.826 h0.8
  text "PD11" at 38.263,77.222 h0.8
  text "PB15" at 29.512,77.15 h0.8
  text "PG1" at 104.107,76.674 h0.8
  text "PB13" at 111.735,76.633 h0.8
  text "PB14/PB15" at 44.298,76.098 h1
  text "5V" at 150.47,75.082 h0.8
  text "PD13" at 38.263,74.674 h0.8
  text "PD12" at 29.512,74.605 h0.8
  text "PF15" at 103.505,74.126 h0.8
  text "PG0" at 111.735,74.094 h0.8
  text "PG3" at 38.263,72.125 h0.8
  text "PG2" at 29.957,72.06 h0.8
  text "PF13" at 103.505,71.577 h0.8
  text "PF14" at 111.735,71.555 h0.8
  text "485_TX" at 117.816,71.095 h0.8
  text "485_RX" at 127.813,70.993 h0.8
  text "GND" at 149.555,70.841 h0.8
  text "PG5" at 38.263,69.577 h0.8
  text "CAN_RX" at 10.643,69.545 h1
  text "CAN_TX" at 22.123,69.545 h1
  text "PG4" at 29.881,69.515 h0.8
  text "PF11" at 103.695,69.029 h0.8
  text "PF12" at 111.735,69.017 h0.8
  text "PA3(RX)" at 117.55,68.504 h0.8
  text "PA2(TX)" at 127.813,68.44 h0.8
  text "3.3V" at 149.606,68.199 h0.8
  text "PA12" at 22.123,67.031 h1
  text "PG7" at 38.263,67.028 h0.8
  text "PA11" at 13.142,67.005 h1
  text "PG6" at 29.957,66.97 h0.8
  text "PB1" at 104.141,66.48 h0.8
  text "PB2" at 111.735,66.478 h0.8
  text "COM2_TX" at 116.891,65.888 h0.8
  text "COM2_RX" at 127.813,65.888 h0.8
  text "PC6" at 38.263,64.48 h0.8
  text "D+" at 22.123,64.465 h1
  text "D-" at 14.641,64.414 h1
  text "PG8" at 29.957,64.425 h0.8
  text "PC5" at 104.019,63.932 h0.8
  text "PB0" at 111.735,63.939 h0.8
  text "PC8" at 38.263,61.931 h0.8
  text "PC7" at 30.06,61.881 h0.8
  text "GBC_RX" at 117.816,61.493 h0.8
  text "PA7" at 103.916,61.383 h0.8
  text "PC4" at 111.735,61.4 h0.8
  text "GBC_TX" at 127.813,61.392 h0.8
  text "PA10(R)" at 22.098,60.223 h1
  text "PA9(T)" at 10.922,60.198 h1
  text "PA8" at 38.263,59.383 h0.8
  text "PC9" at 30.06,59.336 h0.8
  text "PB10(RX)" at 117.55,58.903 h0.8
  text "PA6" at 111.735,58.861 h0.8
  text "PB11(TX)" at 127.813,58.839 h0.8
  text "PA5" at 103.916,58.835 h0.8
  text "RXD" at 13.421,57.607 h1
  text "TXD" at 22.098,57.607 h1
  text "LED" at 157.251,56.985 h0.8
  text "PA14" at 38.263,56.834 h0.8
  text "PA13" at 29.477,56.791 h0.8
  text "PA4" at 111.735,56.323 h0.8
  text "PA0" at 103.916,56.286 h0.8
  text "COM3_RX" at 116.891,56.286 h0.8
  text "COM3_TX" at 127.813,56.286 h0.8
  text "KEY" at 157.328,54.559 h0.8
  text "PC10" at 38.263,54.286 h0.8
  text "PA15" at 29.477,54.246 h0.8
  text "SDIO" at 43.739,53.924 h1.5
  text "PA1" at 111.735,53.784 h0.8
  text "PC3" at 104.019,53.738 h0.8
  text "PC8/PC9/PC10" at 44.044,51.816 h1
  text "RXD" at 157.353,51.765 h0.8
  text "PC12" at 38.263,51.737 h0.8
  text "PC11" at 29.771,51.701 h0.8
  text "PC2" at 111.735,51.245 h0.8
  text "PC1" at 104.21,51.189 h0.8
  text "PC11/PC12/PD2" at 44.12,50.216 h1
  text "TXD" at 157.353,49.378 h0.8
  text "PD3" at 38.263,49.189 h0.8
  text "PD2" at 29.992,49.156 h0.8
  text "PC0" at 111.735,48.706 h0.8
  text "PF10" at 103.505,48.641 h0.8
  text "GND" at 157.328,46.812 h0.8
  text "PD5" at 38.263,46.641 h0.8
  text "PD4" at 29.915,46.611 h0.8
  text "ATK MODULE" at 154.051,46.355 h1 r90
  text "PF9" at 111.735,46.168 h0.8
  text "PF8" at 103.985,46.093 h0.8
  text "5V" at 157.429,44.196 h0.8
  text "PD7" at 38.263,44.092 h0.8
  text "PD6" at 29.992,44.067 h0.8
  text "PF7" at 111.735,43.629 h0.8
  text "PF6" at 103.985,43.544 h0.8
  text "PG10" at 38.263,41.544 h0.8
  text "PG9" at 29.957,41.522 h0.8
  text "PF5" at 111.735,41.09 h0.8
  text "PF4" at 103.909,40.996 h0.8
  text "PG11" at 29.668,38.977 h0.8
  text "PG12" at 38.263,38.995 h0.8
  text "PF3" at 111.735,38.551 h0.8
  text "PF2" at 103.985,38.447 h0.8
  text "PG14" at 38.263,36.447 h0.8
  text "PG13" at 29.477,36.432 h0.8
  text "PF1" at 111.735,36.012 h0.8
  text "PF0" at 103.985,35.899 h0.8
  text "PB3" at 38.263,33.898 h0.8
  text "PG15" at 29.477,33.887 h0.8
  text "PC13" at 111.735,33.474 h0.8
  text "PE6" at 103.985,33.35 h0.8
  text "MIC" at 145.644,32.156 h0.8
  text "PB4" at 29.915,31.342 h0.8
  text "PB5" at 38.263,31.35 h0.8
  text "PE5" at 111.735,30.935 h0.8
  text "PE4" at 103.909,30.802 h0.8
  text "I2C1" at 44.425,29.54 h1.5
  text "PB6" at 29.992,28.798 h0.8
  text "PB7" at 38.263,28.801 h0.8
  text "PE3" at 111.735,28.396 h0.8
  text "PE2" at 103.985,28.253 h0.8
  text "PB6/PB7" at 44.602,27.762 h1
  text "PB8" at 29.992,26.253 h0.8
  text "PB9" at 38.263,26.253 h0.8
  text "PE1" at 111.735,25.857 h0.8
  text "PE0" at 103.985,25.705 h0.8
  text "VDDA" at 118.974,21.869 h0.8
  text "Ref+" at 122.047,21.844 h0.8
  text "GND" at 156.591,20.701 h0.8
  text "DAC" at 156.642,18.085 h0.8
  text "AIN" at 149.098,17.882 h0.8
  text "V3.3" at 106.096,16.764 h0.8
  text "B1" at 109.118,16.764 h0.8
  text "GND" at 111.404,16.764 h0.8
  text "ADC" at 156.642,15.646 h0.8
  text "PDC" at 148.996,15.342 h0.8
  text "TPAD" at 156.794,12.903 h0.8
  text "V3.3" at 106.096,10.008 h0.8
  text "B0" at 109.118,10.008 h0.8
  text "GND" at 111.379,10.008 h0.8
  text "LSENSOR" at 31.318,8.077 h1
  text "RCLK" at 23.47,6.909 h0.8
  text "GND" at 5.817,6.833 h0.8
  text "SCL" at 8.445,6.833 h0.8
  text "SDA" at 11.074,6.833 h0.8
  text "D0" at 13.83,6.833 h0.8
  text "D2" at 16.332,6.833 h0.8
  text "D4" at 18.961,6.833 h0.8
  text "D6" at 21.59,6.833 h0.8
  text "WEN" at 26.848,6.833 h0.8
  text "V3.3" at 4.674,0.432 h0.8
  text "WRST" at 7.976,0.432 h0.8
  text "RRSTOE" at 11.303,0.432 h0.8
  text "D1" at 16.688,0.432 h0.8
  text "D3" at 19.101,0.432 h0.8
  text "D5" at 21.59,0.432 h0.8
  text "VSYNC" at 26.645,0.432 h0.8
  text "D7" at 24.105,0.381 h0.8

## Text inside footprints (layer, text, board x,y; h text height)
2.4'/2.8'LCD: Top Overlay "D14" at 73.866,115.606 h0.5; Top Overlay "RS" at 51.366,115.606 h0.5; Top Overlay "CS" at 51.333,109.22 h0.5; Top Overlay "WR" at 53.873,109.22 h0.5; Top Overlay "RST" at 56.032,109.22 h0.5; Top Overlay "D1" at 59.08,109.22 h0.5; Top Overlay "D2" at 58.991,115.606 h0.5; Top Overlay "D3" at 61.493,109.22 h0.5; Top Overlay "D4" at 61.491,115.606 h0.5; Top Overlay "D5" at 64.033,109.22 h0.5; Top Overlay "D6" at 64.116,115.606 h0.5; Top Overlay "D8" at 66.241,115.606 h0.5; Top Overlay "D9" at 68.986,109.22 h0.5; Top Overlay "D12" at 71.366,115.606 h0.5; Top Overlay "D15" at 76.479,109.22 h0.5; Top Overlay "VDD" at 81.432,109.22 h0.5; Top Overlay "VDD" at 83.991,115.606 h0.5; Top Overlay "GND" at 81.366,115.606 h0.5; Top Overlay "VDD" at 78.866,115.606 h0.5; Top Overlay "D10" at 68.741,115.606 h0.5; Top Overlay "D0" at 56.491,115.606 h0.5; Top Overlay "RD" at 53.866,115.606 h0.5; Top Overlay "GND" at 76.366,115.606 h0.5; Top Overlay "GND" at 83.845,109.22 h0.5; Top Overlay "D11" at 71.399,109.22 h0.5; Top Overlay "PEN" at 89.052,109.22 h0.5; Top Overlay "CLK" at 91.491,115.606 h0.5; Top Overlay "MOSI" at 86.241,115.606 h0.5; Top Overlay "MO" at 89.491,115.606 h0.5; Top Overlay "TCS" at 91.592,109.22 h0.5; Top Overlay "MISO" at 86.131,109.22 h0.5; Top Overlay "BL" at 79.4,109.22 h0.5; Top Overlay "D14" at 73.868,115.6 h0.5; Top Overlay "RS" at 51.368,115.6 h0.5; Top Overlay "CS" at 51.335,109.214 h0.5; Top Overlay "WR" at 53.875,109.214 h0.5; Top Overlay "RST" at 56.034,109.214 h0.5; Top Overlay "D1" at 59.082,109.214 h0.5; Top Overlay "D2" at 58.993,115.6 h0.5; Top Overlay "D3" at 61.495,109.214 h0.5; Top Overlay "D4" at 61.493,115.6 h0.5; Top Overlay "D5" at 64.035,109.214 h0.5; Top Overlay "D6" at 64.118,115.6 h0.5; Top Overlay "D8" at 66.243,115.6 h0.5; Top Overlay "D9" at 68.988,109.214 h0.5; Top Overlay "D13" at 73.868,109.204 h0.5; Top Overlay "D12" at 71.368,115.6 h0.5; Top Overlay "D15" at 76.481,109.214 h0.5; Top Overlay "VDD" at 81.434,109.214 h0.5; Top Overlay "VDD" at 83.993,115.6 h0.5; Top Overlay "GND" at 81.368,115.6 h0.5; Top Overlay "VDD" at 78.868,115.6 h0.5; Top Overlay "D10" at 68.743,115.6 h0.5; Top Overlay "D0" at 56.493,115.6 h0.5; Top Overlay "RD" at 53.868,115.6 h0.5; Top Overlay "GND" at 76.368,115.6 h0.5; Top Overlay "GND" at 83.847,109.214 h0.5; Top Overlay "D11" at 71.401,109.214 h0.5; Top Overlay "PEN" at 89.054,109.214 h0.5; Top Overlay "CLK" at 91.493,115.6 h0.5; Top Overlay "MOSI" at 86.243,115.6 h0.5; Top Overlay "MO" at 89.493,115.6 h0.5; Top Overlay "TCS" at 91.594,109.214 h0.5; Top Overlay "MISO" at 86.133,109.214 h0.5; Top Overlay "BL" at 79.402,109.214 h0.5; Top Overlay "D7" at 66.194,109.214 h0.5
U12: Top Overlay "1" at 139.268,71.069 h0.5 r90
U15: Top Overlay "1" at 139.294,62.078 h0.5 r90